# Altium PCB Top_Cell.PcbDoc
Units mil, origin at the board's own origin, x right, y up, seen from the top; angles counter-clockwise.
Board outline 10125.98 x 3113.96 mil, 2 copper layers (Top Layer, Bottom Layer); 38 components, 15 nets, 104 pads, 0 vias.
Unrouted connection lines stored in the file: 81.
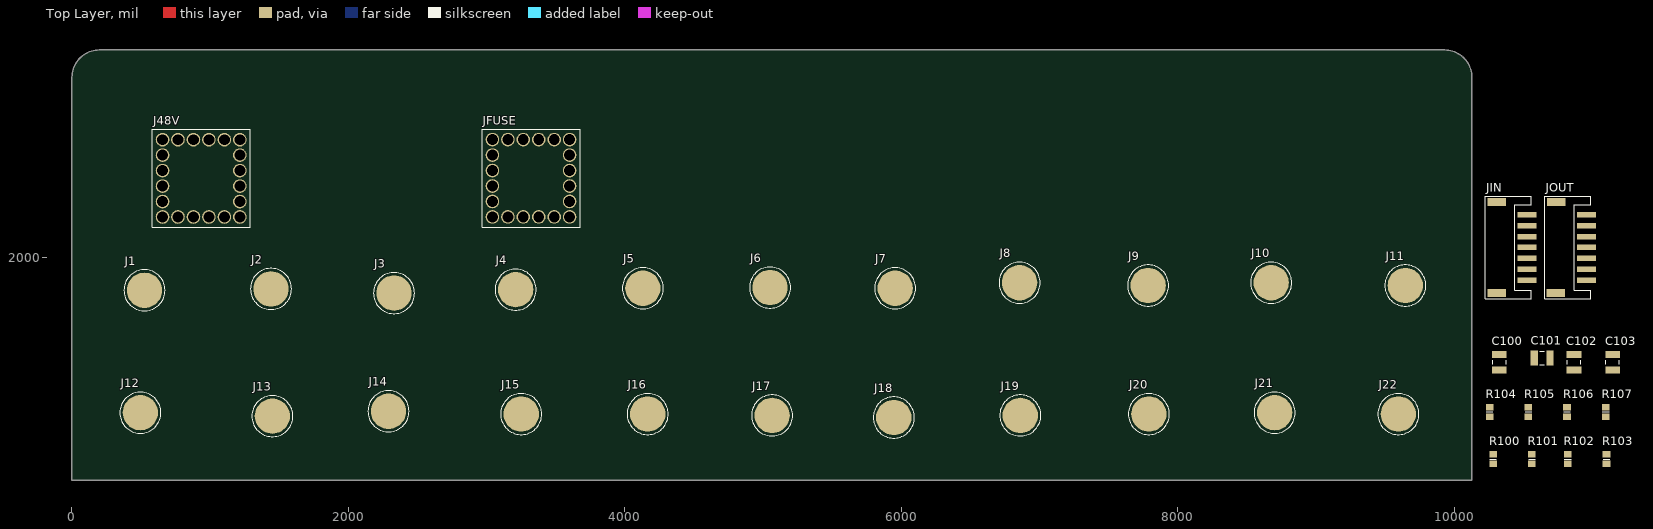
[diagram p0: Top Layer view]
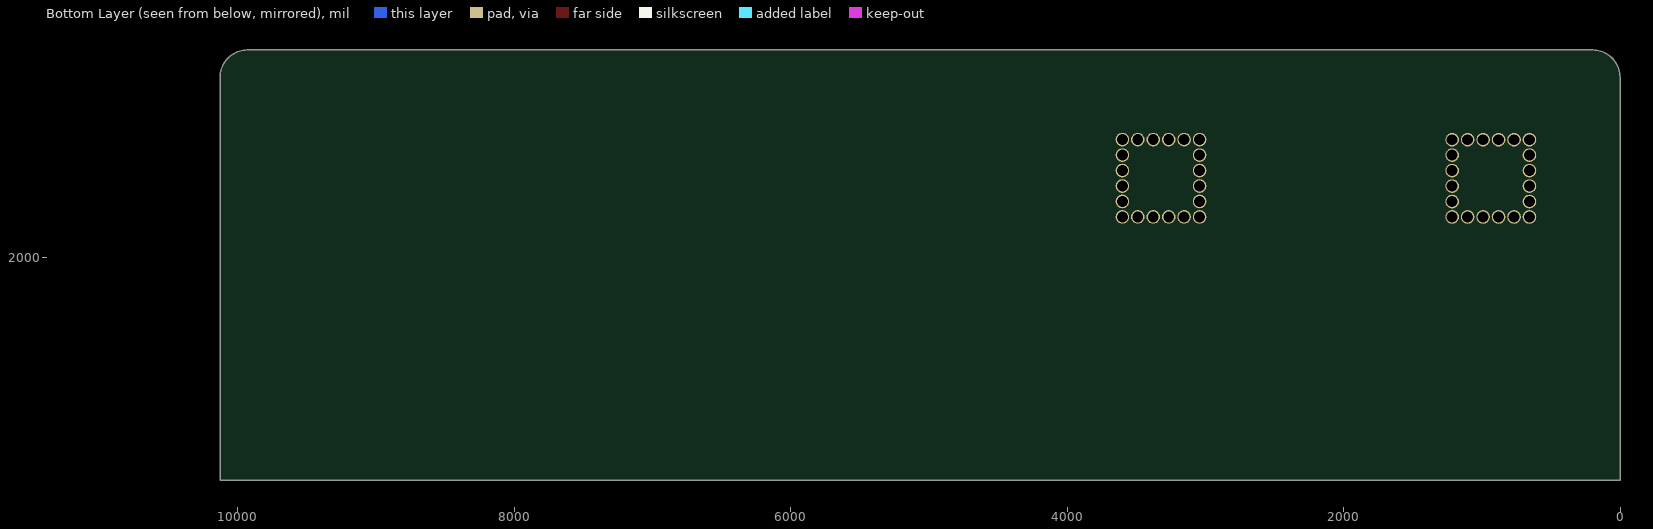
[diagram p1: Bottom Layer view, seen from below]

## Layer stack, top to bottom
Top Solder: solder mask 0.4, Solder Resist, Dk 3.5
Top Layer: signal copper 1.4
Dielectric 1: dielectric 12.6, FR-4, Dk 4.8
Bottom Layer: signal copper 1.4
Bottom Solder: solder mask 0.4, Solder Resist, Dk 3.5

## Board outline
0.5,389.5 10126.48,389.5 10126.48,3306.61 ccw(c9929.63,3306.61) 9929.63,3503.46 197.35,3503.46 ccw(c197.35,3306.61) 0.5,3306.61

## Design rules (kind name [scope] priority, off if disabled: settings)
Clearance [All] p1: gap=10 ignorepadtopadclearanceinfootprint=FALSE except(0: Arc-Hole Track-Hole SMDPad-Hole THPad-Hole Via-Hole Fill-Hole Poly-Hole Region-Hole Text-Hole)
PolygonConnect [All] p1: connectstyle=Relief reliefconductorwidth=10 reliefentries=4 polygonreliefangle="90 Angle" airgapwidth=10
RoutingVias [All] p1: holewidth=28 width=50 viastyle="Through Hole" minholewidth=28 minwidth=50 maxholewidth=28 maxwidth=50
SolderMaskExpansion [All] p1: expansion=4 istentingtop=FALSE
Width [All] p1: maxlimit=10 minlimit=10 preferedwidth=10
30 further rules are at their usual default settings.

## Components (designator, comment, footprint, x,y, rotation, side; value= is the part's Value field where it differs from the comment)
C100 "C1210C106K3RACAUTO" CAPC3225N 10325,1245 r90 top value=10µF
C101 "C1210C106K3RACAUTO" CAPC3225N 10635,1275 r0 top value=10µF
C102 "C1210C106K3RACAUTO" CAPC3225N 10865,1245 r90 top value=10µF
C103 "C1210C106K3RACAUTO" CAPC3225N 11145,1245 r90 top value=10µF
J1 "2036-3-57-15-00-00-03-0" "6mm Pad" 525,1765 r0 top
J2 "2036-3-57-15-00-00-03-0" "6mm Pad" 1440,1775 r0 top
J3 "2036-3-57-15-00-00-03-0" "6mm Pad" 2330,1745 r0 top
J4 "2036-3-57-15-00-00-03-0" "6mm Pad" 3210,1770 r0 top
J5 "2036-3-57-15-00-00-03-0" "6mm Pad" 4130,1780 r0 top
J6 "2036-3-57-15-00-00-03-0" "6mm Pad" 5050,1785 r0 top
J7 "2036-3-57-15-00-00-03-0" "6mm Pad" 5955,1780 r0 top
J8 "2036-3-57-15-00-00-03-0" "6mm Pad" 6855,1820 r0 top
J9 "2036-3-57-15-00-00-03-0" "6mm Pad" 7785,1800 r0 top
J10 "2036-3-57-15-00-00-03-0" "6mm Pad" 8675,1820 r0 top
J11 "2036-3-57-15-00-00-03-0" "6mm Pad" 9645,1800 r0 top
J12 "2036-3-57-15-00-00-03-0" "6mm Pad" 495,880 r0 top
J13 "2036-3-57-15-00-00-03-0" "6mm Pad" 1450,855 r0 top
J14 "2036-3-57-15-00-00-03-0" "6mm Pad" 2290,890 r0 top
J15 "2036-3-57-15-00-00-03-0" "6mm Pad" 3250,870 r0 top
J16 "2036-3-57-15-00-00-03-0" "6mm Pad" 4165,870 r0 top
J17 "2036-3-57-15-00-00-03-0" "6mm Pad" 5065,860 r0 top
J18 "2036-3-57-15-00-00-03-0" "6mm Pad" 5945,845 r0 top
J19 "2036-3-57-15-00-00-03-0" "6mm Pad" 6860,860 r0 top
J20 "2036-3-57-15-00-00-03-0" "6mm Pad" 7790,870 r0 top
J21 "2036-3-57-15-00-00-03-0" "6mm Pad" 8700,880 r0 top
J22 "2036-3-57-15-00-00-03-0" "6mm Pad" 9595,870 r0 top
J48V "S98979" S98979 935,2575 r0 top
JFUSE "S98979" S98979 3320.91,2575.47 r0 top
JIN "S7B-PH-SM4-TB(LF)(SN)" JST-PH-S7 10525,2075 r90 top
JOUT "S7B-PH-SM4-TB(LF)(SN)" JST-PH-S7 10955,2075 r90 top
R100 "ERJ-6ENF1003V" RESC2012N 10280,544.57 r90 top value=100k
R101 "ERJ-6ENF1003V" RESC2012N 10560,544.57 r90 top value=100k
R102 "ERJ-6ENF1003V" RESC2012N 10820,544.57 r90 top value=100k
R103 "ERJ-6ENF1003V" RESC2012N 11100,544.57 r90 top value=100k
R104 "ERJ-6ENF10R0V" RESC2012N 10255,885 r90 top value=10
R105 "ERJ-6ENF10R0V" RESC2012N 10535,885 r90 top value=10
R106 "ERJ-6ENF10R0V" RESC2012N 10815,885 r90 top value=10
R107 "ERJ-6ENF10R0V" RESC2012N 11095,885 r90 top value=10

## Footprints (in the part's own frame and the unit in brackets; to place one, negate y for a bottom-side part, rotate by r counter-clockwise, add the part's x,y. Pads: shape width x height; smd on the part's side, far side on the other; paste and mask are expansions set on the pad)
"6mm Pad" [mm] "Pad, 6mm"
  round 6.5 smd mask+0.508: 1(0,0)
  silkscreen extent -3.78,-3.77 3.78,3.77, body extent -3,-3 3,3, height 1.4
CAPC3225N [mm] "Chip Capacitor Body 3.2x2.5mm, IPC Medium Density"
  rect 1.3x2.7 smd: 1(-1.45,0) 2(1.45,0)
  silkscreen extent -0.4,-1.25 0.4,1.25, body extent -1.67,-1.32 1.67,1.32, height 1.5
JST-PH-S7 [mm] "Locking Connector; Side-Entry; Header; 7-Pin, 2mm pitch"
  rect 1x3.5 smd: 1(-6,0) 2(-4,0) 3(-2,0) 4(0,0) 5(2,0) 6(4,0) 7(6,0)
  rect 1.5x3.4 smd: 8(-8.382,5.588) 9(8.35,5.55)
  silkscreen extent -9.4,-0.76 9.4,7.62, body extent -8.95,-1.49 8.95,7.11, height 5.5
RESC2012N [mm] "Chip Resistor, Body 2.0x1.2mm, IPC Medium Density"
  rect 1.2x1.4 smd: 1(-0.9,0) 2(0.9,0)
  silkscreen extent 0,-0.6 0,0.6, body extent -1.07,-0.7 1.07,0.7, height 0.7
S98979 [mm] "20 Pin Shank Terminal M8 Through Hole"
  round 2.5 hole 2: 1(-7.1,-7.1) 1(-7.1,-4.26) 1(-7.1,-1.42) 1(-7.1,1.42) 1(-7.1,4.26) 1(-7.1,7.1) 1(-4.26,-7.1) 1(-4.26,7.1) 1(-1.42,-7.1) 1(-1.42,7.1) 1(1.42,-7.1) 1(1.42,7.1) 1(4.26,-7.1) 1(4.26,7.1) 1(7.1,-7.1) 1(7.1,-4.26) 1(7.1,-1.42) 1(7.1,1.42) 1(7.1,4.26) 1(7.1,7.1)
  silkscreen extent -9,-9 9,9, body extent -7.7,-7.7 7.7,7.7, height 31.5

## Part data
C100 C101 C102 C103: "Capacitor, Ceramic, 10µF, 25V, 0805, 10%, 125C", Supplier Part Number 1=399-7046-1-ND, Temp=125C, Category=C, Rated=25V, Supplier 1=Digi-Key, Tol=10%
J1 J2 J3 J4 J5 J6 J7 J8 J9 J10 J11 J12 J13 J14 J15 J16 J17 J18 J19 J20 J21 J22: "Hardware, Sprint Contact Surface", Supplier Part Number 1=54-2036-3-57-15-00-00-03-0CT-ND, Supplier 1=Digi-Key
J48V JFUSE: "Screw Terminal M8, 360A", Supplier Part Number 1=2101-S98979-ND, Supplier 1=Digi-Key
JIN JOUT: "Header, JST, 7-Pin, Right-Angle, PH, Surface Mount", Supplier Part Number 1=455-1754-1-ND, Category=J, Supplier 1=Digi-Key
R100 R101 R102 R103: "Resistor, Fixed, 100 kOhm, 0805, 1%, 1/8W", Supplier Part Number 1=P100KCCT-ND, Category=R, Rated=1/8W, Supplier 1=Digi-Key, Tol=1%
R104 R105 R106 R107: "Resistor, Fixed, 10 Ohm, 0805, 1%, 1/8W", Supplier Part Number 1=P10.0CCT-ND, Category=R, Rated=1/8W, Supplier 1=Digi-Key, Tol=1%

## Nets (pads, with @x,y where several pads share a name; then routed paths per layer and width w, separated by ;. In a path a pad name is that pad's centre, name@x,y a point inside that pad or via, vN(x,y) a via of type N, cw(c..) or ccw(c..) an arc to the next point about the centre after c; other vN are vias at no path point)
SCL: R107.2
SCL_IN: C103.1 JIN.5
SCL_OUT: C103.2 JOUT.3 R103.2 R107.1
SDA: R106.1
SDA_IN: C102.1 JIN.4
SDA_OUT: C102.2 JOUT.4 R102.1 R106.2
ST_CH: R104.1
ST_CH_IN: C100.1 JIN.2
ST_CH_OUT: C100.2 JOUT.6 R100.1 R104.2
ST_DIS: R105.2
ST_DIS_IN: C101.1 JIN.3
ST_DIS_OUT: C101.2 JOUT.5 R101.2 R105.1
VNEG: J1.1 J2.1 J3.1 J4.1 J5.1 J6.1 J7.1 J8.1 J9.1 J10.1 J11.1 J12.1 J13.1 J14.1 J15.1 J16.1 J17.1 J18.1 J19.1 J20.1 J21.1 J22.1 JFUSE.1 JIN.1
VO: J48V.1
VPOS: JOUT.7 R100.2 R101.1 R102.2 R103.1
pads on no net: JIN.6 JIN.7 JIN.8 JIN.9 JOUT.1 JOUT.2 JOUT.8 JOUT.9

## Silkscreen, mask and mechanical layers (free items; w line width, h text height)
Mechanical 1:
  drawing of 160 lines, arcs and shapes, not listed